# Altium PCB PCB_CorvetteALDL_2024-03-25.pcbdoc
Units mil, origin at the board's own origin, x right, y up, seen from the top; angles counter-clockwise.
Board outline 3375.73 x 2527.89 mil, 2 copper layers (Top Layer, Bottom Layer); 19 components, 13 nets, 69 pads, 3 vias.
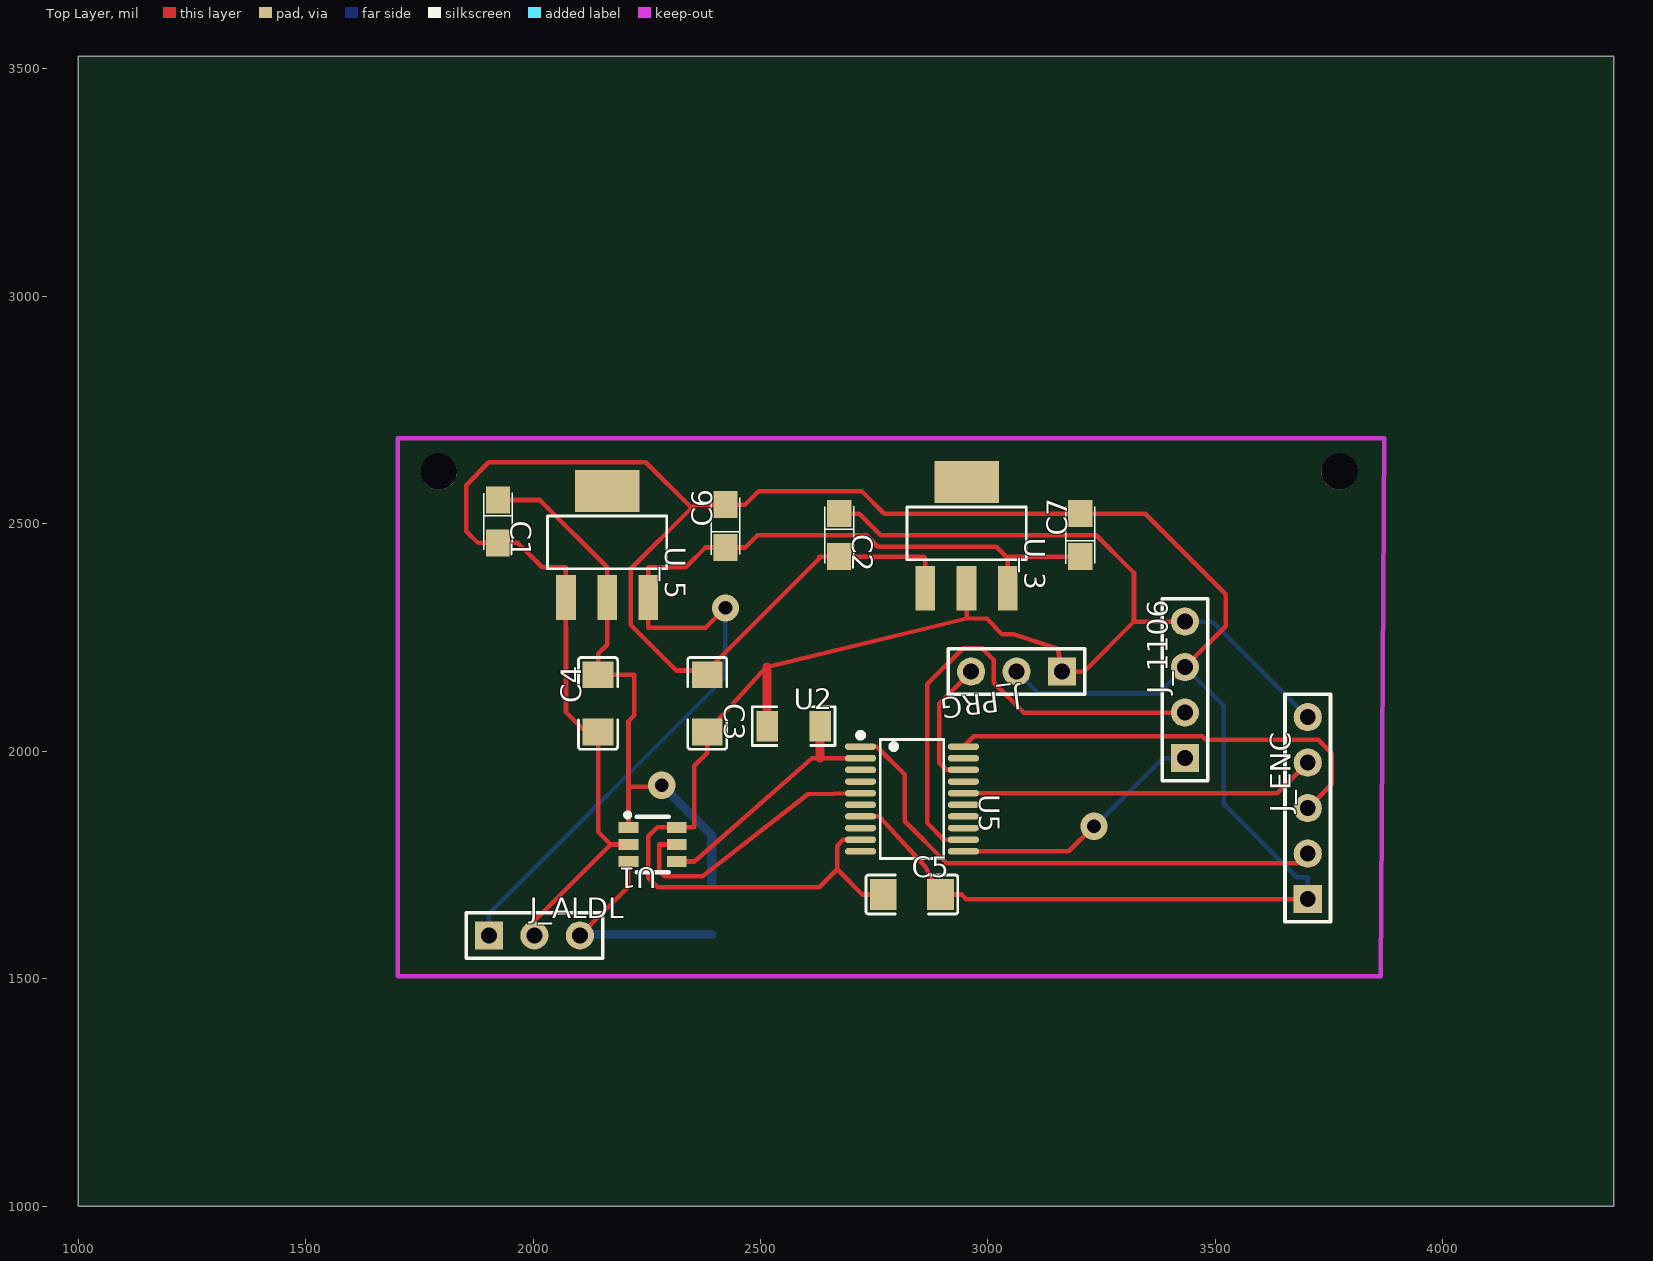
[diagram p0: Top Layer view]
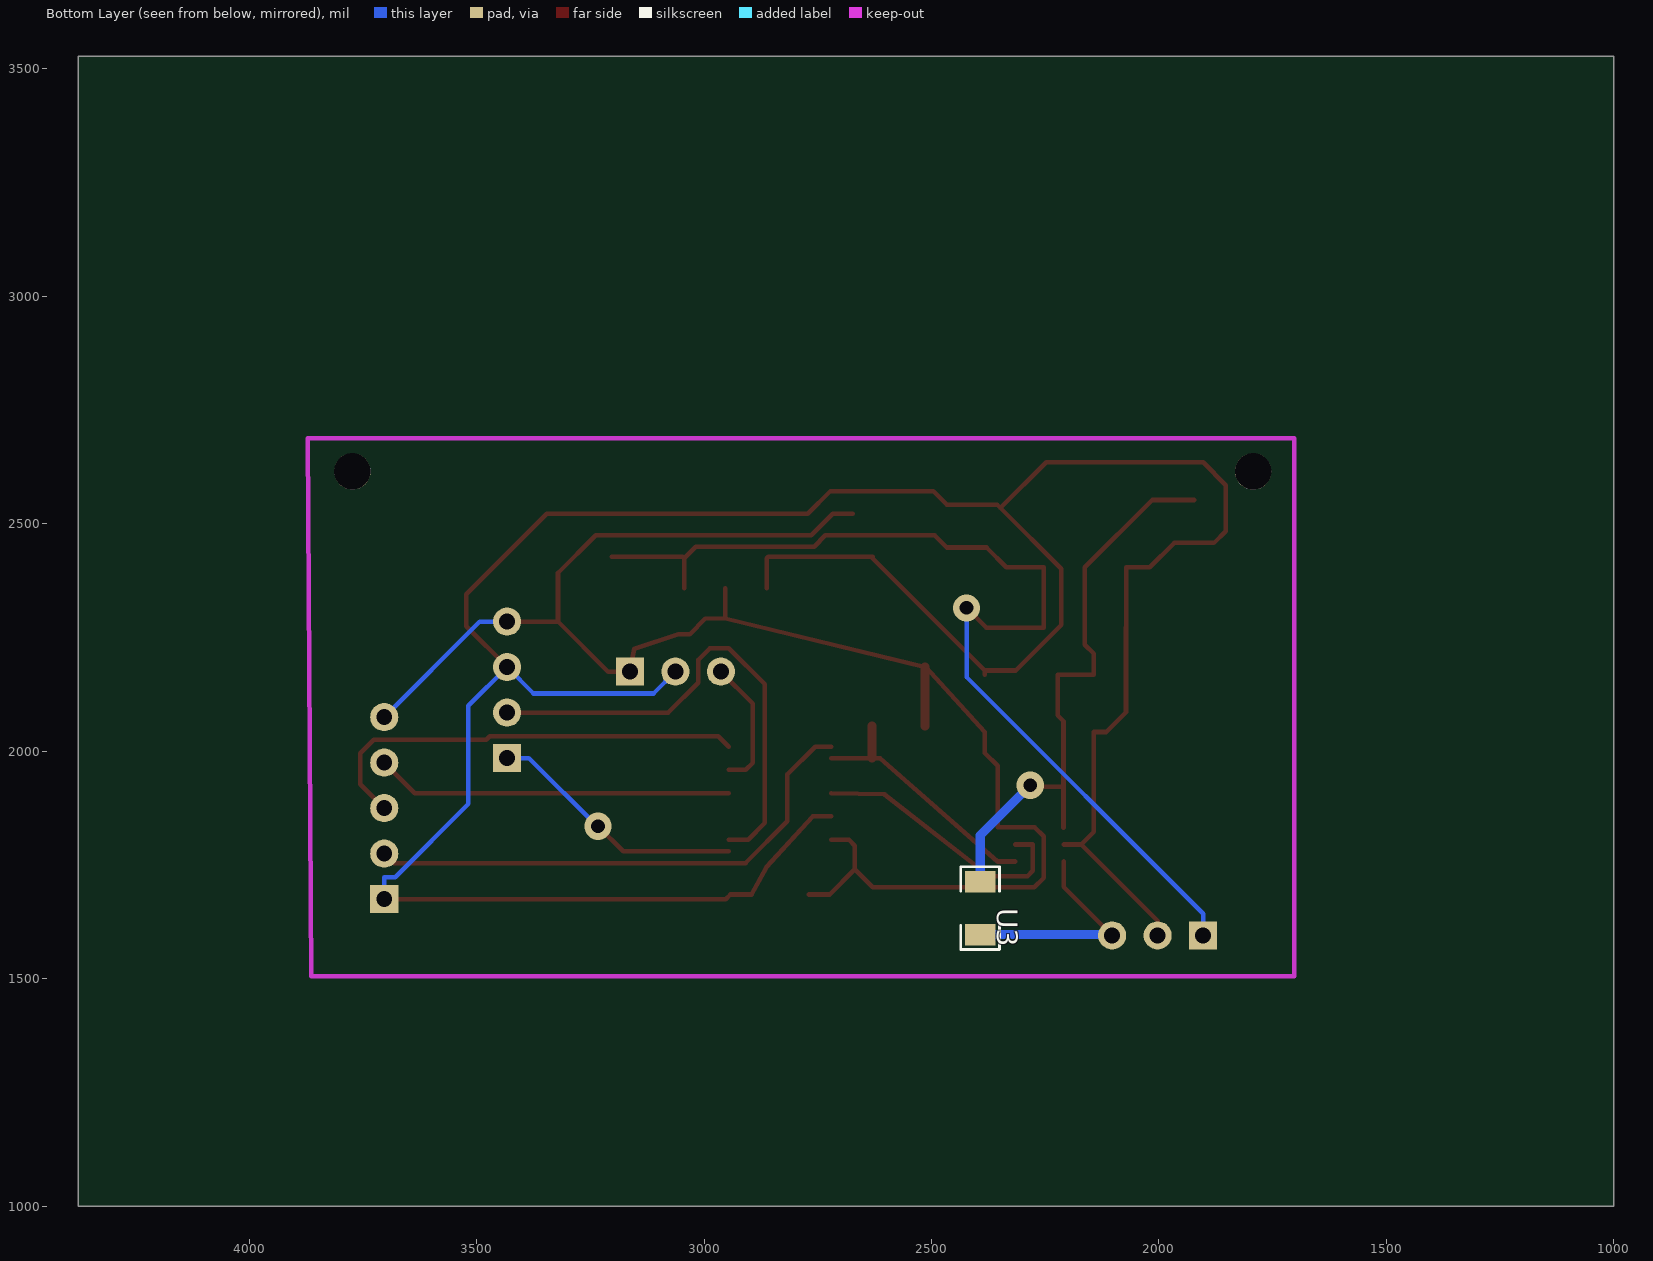
[diagram p1: Bottom Layer view, seen from below]

## Layer stack, top to bottom
Top Layer: signal copper (thickness not stored)
Dielectric: dielectric 12.6, FR-4, Dk 4.8
Bottom Layer: signal copper (thickness not stored)

## Board outline
4375.73,1000 1000,1000 1000,3527.89 4375.73,3527.89

## Components (designator, comment, footprint, x,y, rotation, side; value= is the part's Value field where it differs from the comment)
C1 "10uF" CASE-A_3216 1922.86,2505 r270 top
C2 "10uF" CASE-A_3216 2672.86,2475 r270 top
C3 "100nF" C1206 2382.86,2105 r270 top
C4 "100nF" C1206 2142.86,2105 r90 top
C5 "100nF" C1206 2832.86,1685 r0 top
C6 "10uF" CASE-A_3216 2422.86,2495 r90 top
C7 "10uF" CASE-A_3216 3202.86,2475 r90 top
J_1106 "HDR-M-2.54_1x4" HDR-M-2.54_1X4 3432.86,2135 r90 top
J_ALDL "HDR-M-2.54_1x3" HDR-M-2.54_1X3 2002.86,1595 r0 top
J_ENC "HDR-M-2.54_1x5" HDR-M-2.54_1X5 3702.86,1875 r90 top
J_PRG "HDR-M-2.54_1x3" HDR-M-2.54_1X3 3062.86,2175 r180 top
U1 "SN74LVC1T45DBVR" SOT-23-6_L2.9-W1.6-P0.95-LS2.8-BR 2262.86,1795 r180 top
U2 "4.7kΩ" R1206#1 2572.86,2055 r0 top
U3 "4.7kΩ" R1206#2 2392.86,1655 r90 bottom
U5 "CH32V003F4P6" TSSOP-20_L6.5-W4.4-P0.65-LS6.4-BL 2832.86,1895 r270 top
U_3 "LM1117GS-3.3" SOT-223-3_L6.5-W3.4-P2.30-LS7.0-BR 2952.86,2475 r270 top
U_5 "LM1117GS-5.0" SOT-223-3_L6.5-W3.4-P2.30-LS7.0-BR 2162.86,2455 r270 top
? "" ? 1598.38,2100 r0 top
? "" ? 2782.86,2821.29 r0 top

## Footprints (in the part's own frame and the unit in brackets; to place one, negate y for a bottom-side part, rotate by r counter-clockwise, add the part's x,y. Pads: shape width x height; smd on the part's side, far side on the other; paste and mask are expansions set on the pad)
C1206 [mm]
  rect 1.485x1.728 smd paste-100 mask+0.051: 1(-1.593,0) 2(1.593,0)
  silkscreen extent -2.56,-1.09 2.56,1.09
CASE-A_3216 [mm]
  rect 1.5x1.359 smd paste+0 mask+0.051: 1(-1.2,0) 2(1.2,0)
  silkscreen extent -1.6,-0.8 1.6,0.8
HDR-M-2.54_1X3 [mil]
  rect 62x62 hole 35 paste+0 mask+2: 1(-100,0)
  round 62 hole 35 paste+0 mask+2: 2(0,0) 3(100,0)
  silkscreen extent -150,-50 150,50
HDR-M-2.54_1X4 [mil]
  rect 62x62 hole 35 paste+0 mask+2: 1(-150,0)
  round 62 hole 35 paste+0 mask+2: 2(-50,0) 3(50,0) 4(150,0)
  silkscreen extent -200,-50 200,50
HDR-M-2.54_1X5 [mil]
  rect 62x62 hole 35 paste+0 mask+2: 1(-200,0)
  round 62 hole 35 paste+0 mask+2: 2(-100,0) 3(0,0) 4(100,0) 5(200,0)
  silkscreen extent -250,-50 250,50
R1206#1 [mil]
  rect 47.54x66.97 smd paste-3937.01 mask+2: 1(-58.22,0) 2(58.22,0)
  silkscreen extent -91,-42 91,42
R1206#2 [mil]
  rect 47.54x66.97 smd paste-3937.01 mask+2: 1(58.22,0) 2(-58.22,0)
  silkscreen extent -91,-42 91,42
SOT-23-6_L2.9-W1.6-P0.95-LS2.8-BR [mm]
  rect 1.1x0.6 smd paste+0 mask+0.051: 1(1.35,-0.95) 2(1.35,0) 3(1.35,0.95) 4(-1.35,0.95) 5(-1.35,0) 6(-1.35,-0.95)
  silkscreen extent -0.9,-1.78 1.52,1.55
SOT-223-3_L6.5-W3.4-P2.30-LS7.0-BR [mm]
  rect 2.5x1.1 smd paste+0 mask+0.051: 1(2.97,-2.3) 2(2.97,0) 3(2.97,2.3)
  rect 2.34x3.6 smd paste+0 mask+0.051: 4(-2.97,0)
  silkscreen extent -1.57,-3.33 1.37,3.33
TSSOP-20_L6.5-W4.4-P0.65-LS6.4-BL [mm]
  oval 0.364x1.742 smd paste+0 mask+0.051: 1(-2.925,-2.871) 2(-2.275,-2.871) 3(-1.625,-2.871) 4(-0.975,-2.871) 5(-0.325,-2.871) 6(0.325,-2.871) 7(0.975,-2.871) 8(1.625,-2.871) 9(2.275,-2.871) 10(2.925,-2.871) 11(2.925,2.871) 12(2.275,2.871) 13(1.625,2.871) 14(0.975,2.871) 15(0.325,2.871) 16(-0.325,2.871) 17(-0.975,2.871) 18(-1.625,2.871) 19(-2.275,2.871) 20(-2.925,2.871)
  silkscreen extent -3.71,-3.02 3.33,1.77
? [mil]

## Free pads (board coordinates)
  round 80 hole 80 unplated paste+0: ""(1792.86,2615) ""(3772.86,2615)

## Via types
v1: diameter 60, hole 30, Top Layer to Bottom Layer, tented both sides, 3 vias

## Nets (pads, with @x,y where several pads share a name; then routed paths per layer and width w, separated by ;. In a path a pad name is that pad's centre, name@x,y a point inside that pad or via, vN(x,y) a via of type N, cw(c..) or ccw(c..) an arc to the next point about the centre after c; other vN are vias at no path point)
+3.3V: C2.1 C3.2 C5.1 J_1106.4 J_ENC.5 J_PRG.1 U1.6 U2.1 U5.9 U_3.2 | length 3690
  Top Layer w10: C2.1 2716.64,2522.24 2764.5,2474.38 3238.28,2474.38 3320.89,2391.77 3320.89,2285 ; U5.9 2681.3,1805.43 2668.46,1792.59 2668.46,1740.44 ; C5.1 2723.9,1685 2668.46,1740.44 ; 2952.86,2291.8 2512.86,2185 C3.2 2382.86,1996.04 2354.69,1967.87 2354.69,1832.4 U1.6 2272.97,1832.4 2253.45,1812.88 2253.45,1721.46 2274.22,1700.69 2628.71,1700.69 2668.46,1740.44 ; 2952.86,2291.83 2952.86,2297.32 2952.86,2324.95 U_3.2 ; 2952.86,2292 2996.86,2291.6 3030.86,2257 3056.36,2257 3152.86,2225 J_PRG.1 3210.89,2175 3320.89,2285 ; J_1106.4 3320.89,2285
  Top Layer w20: U2.1 2514.64,2185
  Bottom Layer w10: J_1106.4 3492.86,2285 J_ENC.5
+5V: C1.1 C4.2 U1.1 U3.1 U_5.2 | length 1298.8
  Top Layer w10: C1.1 1966.64,2552.24 ; 1966.66,2552.2 2014.96,2552.2 2162.86,2404.3 U_5.2 2162.86,2233.96 2142.86,2213.96 C4.2 2222.86,2167.7 2222.86,2079.2 2209.76,2066 U1.1@2209.76,1832 ; 2209.76,1922.35 2280.21,1922.35 v1(2282.86,1925)
  Bottom Layer w20: v1(2282.86,1925) 2392.86,1815 U3.1
+12V: C6.1 C7.1 J_ALDL.1 U_3.3 U_5.3 | length 2322.1
  Top Layer w10: v1(2422.86,2315) 2379.69,2271.83 2253.41,2271.83 U_5.3 2253.41,2371.2 2253.41,2404.32 2335.64,2404.32 2379.08,2447.76 C6.1 2466.64,2447.76 2493.24,2474.36 2733.29,2474.36 2757.81,2449.84 3017.89,2449.84 3043.41,2424.32 ; U_3.3 3043.41,2418.83 3043.41,2424.32 ; C7.1 3046.85,2427.76 3043.41,2424.32
  Bottom Layer w10: J_ALDL.1 1902.86,1643.03 2422.86,2163.03 v1(2422.86,2315)
ALDL: J_ALDL.3 U1.3 U3.2 | length 497.6
  Top Layer w10: J_ALDL.3 2209.71,1701.85 U1.3
  Bottom Layer w20: J_ALDL.3 2104.64,1596.78 U3.2
DIR: U1.5 U5.5 | length 605.9
  Top Layer w10: U1.5 2277.33,1795 2277.28,1794.95 2277.28,1737.12 2288.66,1725.74 2372.86,1725 2602.86,1905 U5.5
GND: C1.2 C2.2 C3.1 C4.1 C5.2 C6.2 C7.2 J_1106.3 J_ALDL.2 J_ENC.1 J_PRG.2 U1.2 U5.7 U_3.1 U_5.1 | length 6674.3
  Top Layer w10: 1879.06,2457.8 1852.86,2483.9 1852.86,2585 1902.96,2635.1 2248.06,2635.1 2348.36,2534.8 ; 1879.08,2457.76 C1.2 1966.64,2457.76 2020.08,2404.32 2072.31,2404.32 U_5.1 2072.31,2304.95 2072.31,2271.83 ; J_ALDL.2 2002.86,1626.84 2171.02,1795 ; 2072.36,2272 2072.36,2085.5 2115.56,2042.3 C4.1 2142.86,1823.16 2171.02,1795 ; U1.2 2171.02,1795 ; C3.1 C3.1@2382.86,2177.39 ; U5.7@2719.86,1856.6 2761.26,1856.6 2862.86,1745 C5.2 2941.82,1685 2951.82,1675 J_ENC.1 ; U_3.1 2862.31,2424.32 2858.87,2427.76 C2.2 2629.08,2427.76 2629.08,2423.61 C3.1@2382.86,2177.39 ; C7.2 3345.66,2522.2 3522.86,2345 3522.86,2275 J_1106.3 ; C7.2 2771.58,2522.24 2721.9,2571.92 2496.32,2571.92 2466.64,2542.24 C6.2 2379.08,2542.24 2355.87,2542.24 2348.38,2534.75 2214.68,2401.05 2214.68,2277.53 2314.82,2177.39 C3.1@2382.86,2177.39
  Bottom Layer w10: J_PRG.2 3110.94,2126.92 3374.78,2126.92 J_1106.3 3517.82,2100.04 3517.82,1884.05 3678.84,1723.03 3702.86,1723.03 J_ENC.1
KEY: J_ENC.4 U5.16 | length 784.8
  Top Layer w10: U5.16 3635.65,1907.79 J_ENC.4
RX_TX: U1.4 U2.2 U5.2 | length 559.8
  Top Layer w10: U1.4 2354.69,1757.6 2612.86,1985 U5.2
  Top Layer w20: 2631.08,1984.93 U2.2
S1: J_ENC.2 U5.1 | length 1158.1
  Top Layer w10: U5.1 2755.78,2010.16 2817.02,1948.92 2817.02,1845.82 2908.63,1754.21 3682.07,1754.21 J_ENC.2
S2: J_ENC.3 U5.20 | length 976.8
  Top Layer w10: U5.20 2968.8,2033.07 3470.93,2033.07 3479.01,2024.99 3725.83,2024.99 3755.46,1995.36 3755.46,1927.6 J_ENC.3
SCL: J_1106.2 U5.12 | length 1087.4
  Top Layer w10: U5.12 2902.95,1805.43 2866,1842.38 2866,2147.03 2945.49,2226.52 2986.94,2226.52 3012.86,2200.6 3012.86,2150.9 3078.76,2085 J_1106.2
SDA: J_1106.1 U5.11 | length 571.9
  Top Layer w10: U5.11 3177.7,1779.84 v1(3232.86,1835)
  Bottom Layer w10: v1(3232.86,1835) 3234.83,1835 3384.83,1985 J_1106.1
SWIO: J_PRG.3 U5.18 | length 289.4
  Top Layer w10: U5.18 2907.91,1958.98 2892.66,1974.23 2892.66,2104.8 J_PRG.3
pads on no net: U5.3 U5.4 U5.6 U5.8 U5.10 U5.13 U5.14 U5.15 U5.17 U5.19 U_3.4 U_5.4